# Altium PCB NC1-1B-PANEL.PcbDoc
Units mm, origin at the board's own origin, x right, y up, seen from the top; angles counter-clockwise.
Board outline 158 x 88 mm, 4 copper layers (Top Layer, Mid 1 (GND), Mid 2 (PWR), Bottom Layer), stack 1.586 mm thick; 10 components, 0 nets, 18 pads, 0 vias.
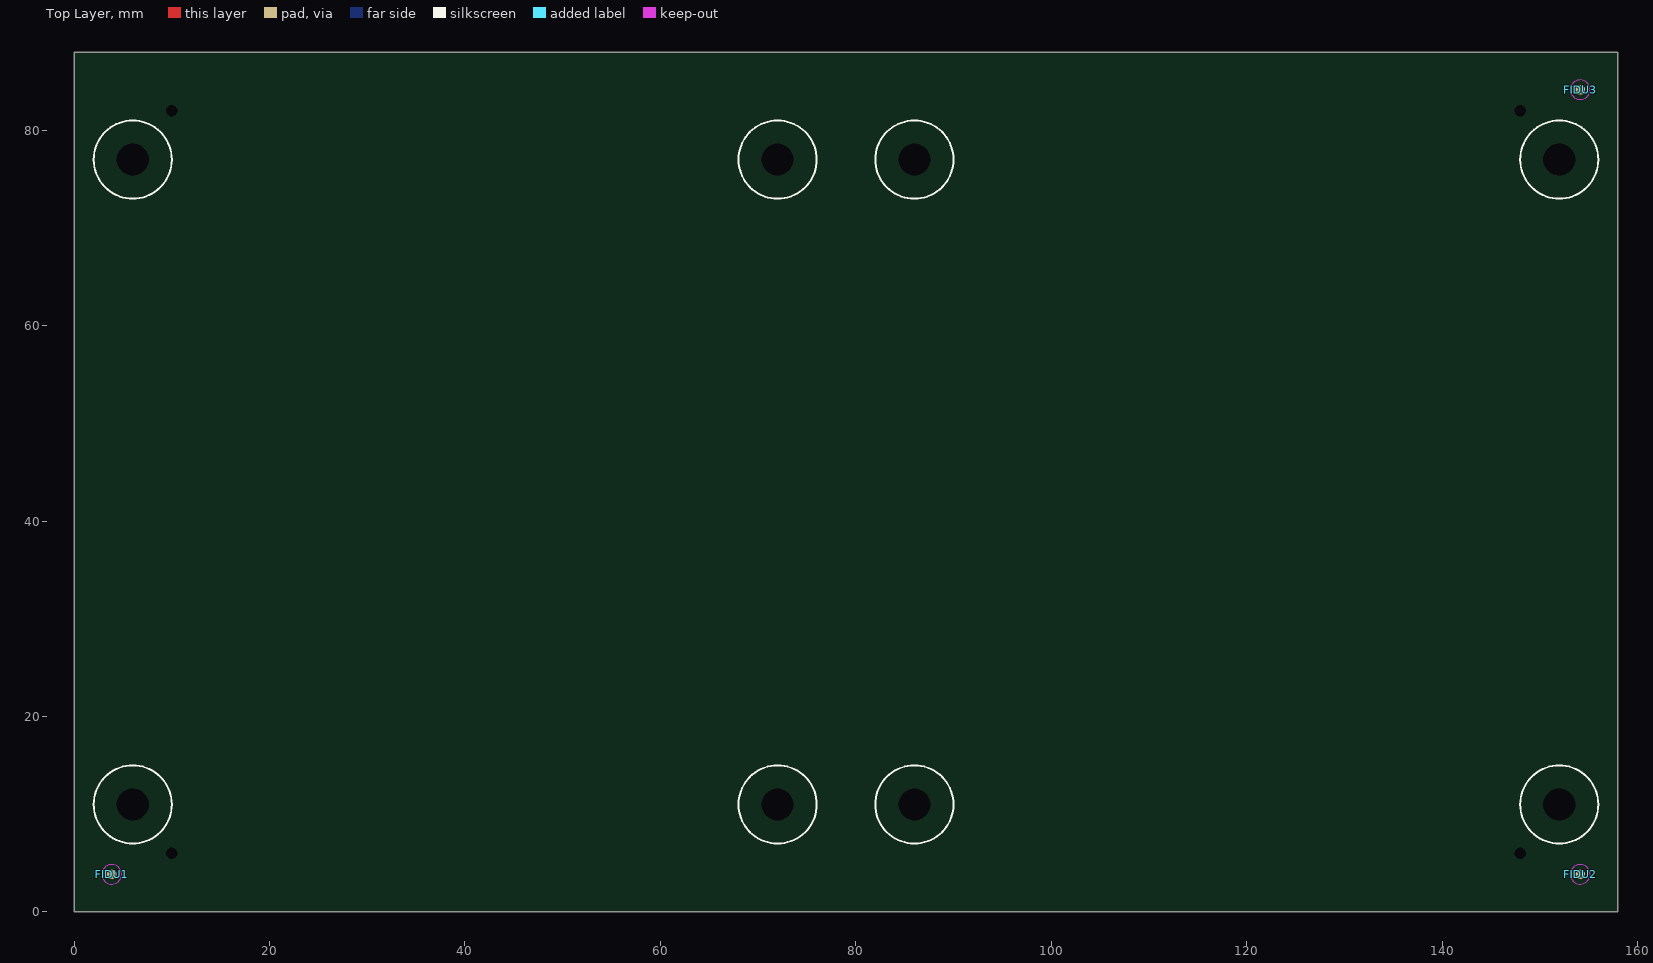
[diagram p0: Top Layer view]
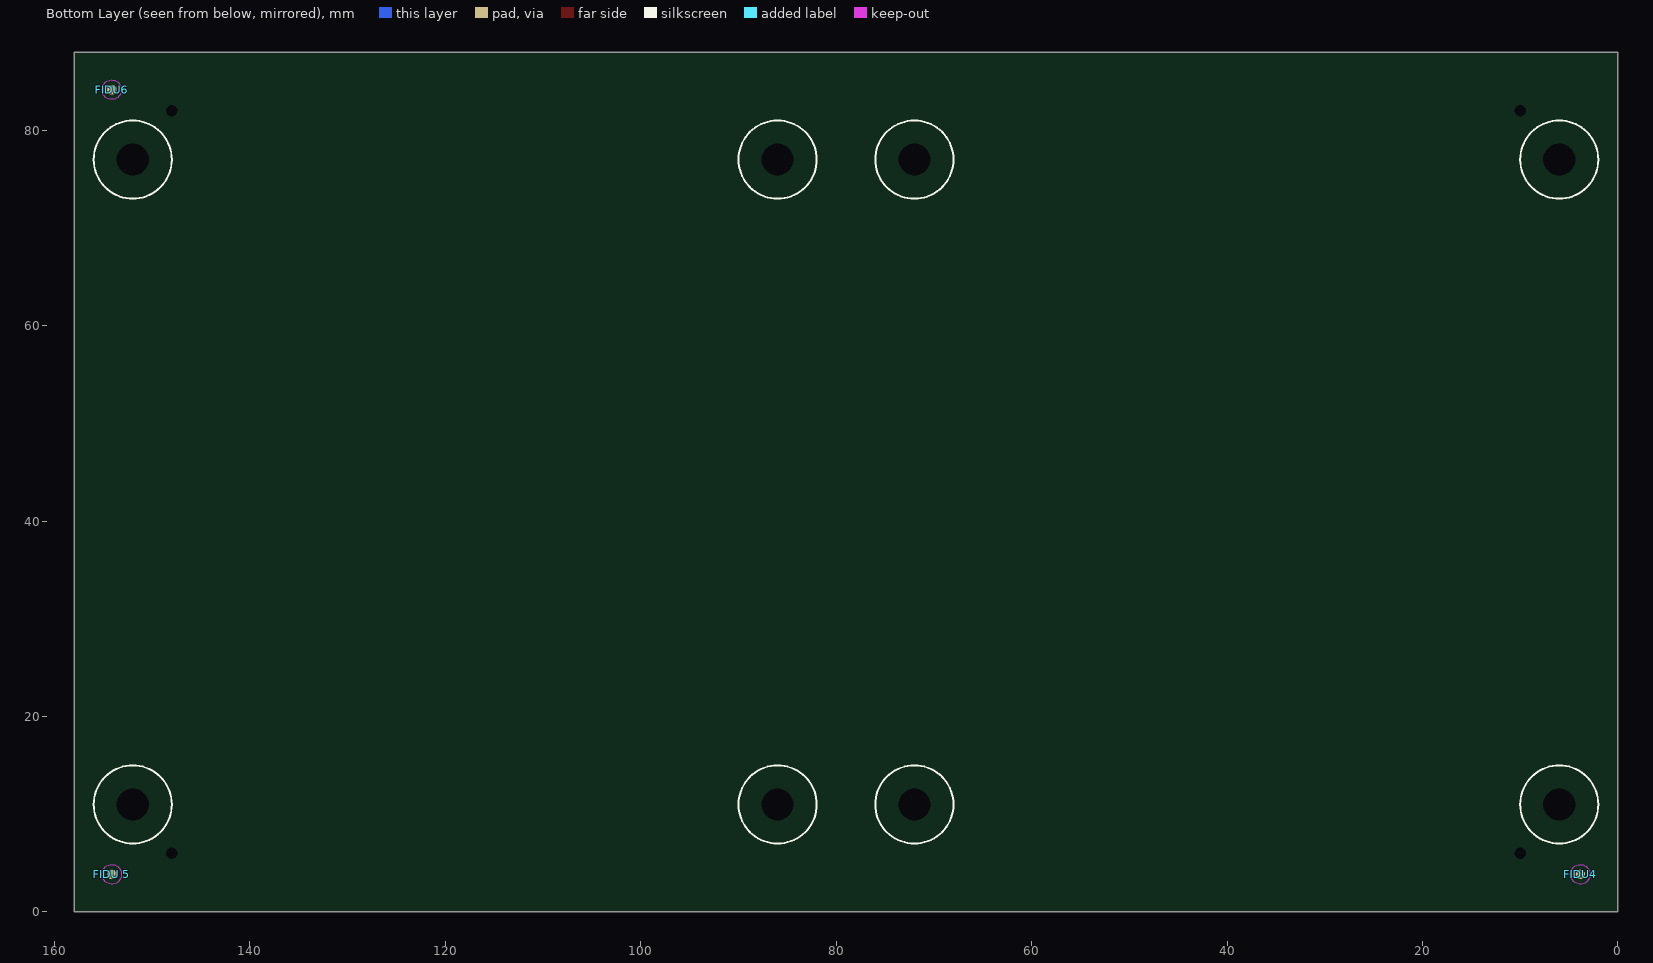
[diagram p1: Bottom Layer view, seen from below]

## Layer stack, top to bottom
Top Solder: solder mask 0.0102, Solder Resist, Dk 3.5
Top Layer: signal copper 0.035
Dielectric 2: prepreg 0.2104, PP-006, Dk 4.1
Mid 1 (GND): signal copper 0.0152
Dielectric 1: dielectric 1.065, FR-4, Dk 4.8
Mid 2 (PWR): signal copper 0.0152
Dielectric 3: prepreg 0.2104, PP-006, Dk 4.1
Bottom Layer: signal copper 0.035
Bottom Solder: solder mask 0.0102, Solder Resist, Dk 3.5

## Board outline
0,0 158,0 158,88 0,88

## Design rules (kind name [scope] priority, off if disabled: settings)
Clearance [All] p1: gap=0.254 ignorepadtopadclearanceinfootprint=FALSE except(0: Arc-Hole Track-Hole SMDPad-Hole THPad-Hole Via-Hole Fill-Hole Poly-Hole Region-Hole Text-Hole)
PolygonConnect [All] p1: connectstyle=Relief reliefconductorwidth=0.254 reliefentries=4 polygonreliefangle="90 Angle" airgapwidth=0.254
RoutingVias [All] p1: holewidth=0.711 width=1.27 viastyle="Through Hole" minholewidth=0.711 minwidth=1.27 maxholewidth=0.711 maxwidth=1.27
SolderMaskExpansion [All] p1: expansion=0.102 istentingtop=FALSE
Width [All] p1: maxlimit=0.254 minlimit=0.254 preferedwidth=0.254
30 further rules are at their usual default settings.

## Components (designator, comment, footprint, x,y, rotation, side; value= is the part's Value field where it differs from the comment)
FIDU1 "Comment" FIDU 3.85,3.85 r0 top
FIDU2 "Comment" FIDU 154.15,3.85 r0 top
FIDU3 "Comment" FIDU 154.15,84.15 r0 top
FIDU4 "Comment" FIDU 3.85,3.85 r180 bottom
FIDU6 "Comment" FIDU 154.15,84.15 r180 bottom
"FIDU 5" "Comment" FIDU 154.15,3.85 r180 bottom
? "Comment" JLC-TOOLING 10,82 r0 top
? "Comment" JLC-TOOLING 148,6 r0 top
? "Comment" JLC-TOOLING 148,82 r0 top
? "Comment" JLC-TOOLING 10,6 r0 top

## Footprints (in the part's own frame and the unit in brackets; to place one, negate y for a bottom-side part, rotate by r counter-clockwise, add the part's x,y. Pads: shape width x height; smd on the part's side, far side on the other; paste and mask are expansions set on the pad)
FIDU [mm]
  round 1 smd mask+0.5: 1(0,0)
  Top Layer keep-out circle w0.1: c0,0 r1
JLC-TOOLING [mm] "Tooling holes as specified by JLCPCB"
  round 0 hole 1.152 unplated paste-2539.97 mask+0.65: 0(0,0)

## Free pads (board coordinates)
  round 0 hole 3.3 unplated: M(6,11) M(6,77) M(72,11) M(72,77) M(86,11) M(86,77) M(152,11) M(152,77)

## Nets (pads, with @x,y where several pads share a name; then routed paths per layer and width w, separated by ;. In a path a pad name is that pad's centre, name@x,y a point inside that pad or via, vN(x,y) a via of type N, cw(c..) or ccw(c..) an arc to the next point about the centre after c; other vN are vias at no path point)
pads on no net: "FIDU 5.1" ?.0 FIDU1.1 FIDU2.1 FIDU3.1 FIDU4.1 FIDU6.1

## Silkscreen, mask and mechanical layers (free items; w line width, h text height)
Top Overlay:
  circle w0.2: c86,77 r4
  circle w0.2: c152,77 r4
  circle w0.2: c152,11 r4
  circle w0.2: c86,11 r4
  circle w0.2: c6,77 r4
  circle w0.2: c72,77 r4
  circle w0.2: c72,11 r4
  circle w0.2: c6,11 r4
Bottom Overlay:
  circle w0.2: c86,11 r4
  circle w0.2: c152,11 r4
  circle w0.2: c152,77 r4
  circle w0.2: c86,77 r4
  circle w0.2: c6,11 r4
  circle w0.2: c72,11 r4
  circle w0.2: c72,77 r4
  circle w0.2: c6,77 r4
Board:
  lines w0.1: 1.904,26.539 ccw(c1,26.111) 0,26.111 0,0 158,0 158,26.111 ccw(c157,26.111) 156.096,26.539 ; 1.904,61.461 cw(c1,61.889) 0,61.889 0,88 158,88 ; 9.383,15.648 ccw(c39,44) 10.648,14.383 ; 9.383,72.352 cw(c39,44) 10.648,73.617 ; 22.487,6.472 ccw(c39,44) 55.513,6.472 ; 22.487,81.528 cw(c39,44) 55.513,81.528 ; 67.352,14.383 ccw(c39,44) 68.617,15.648 ; 67.352,73.617 cw(c39,44) 68.617,72.352 ; 76.528,27.487 ccw(c39,44) 78.048,31.499 cw(c79,31.194) 79.952,31.499 ccw(c119,44) 81.472,27.487 ; 76.528,60.513 cw(c39,44) 78.048,56.501 ccw(c79,56.806) 79.952,56.501 cw(c119,44) 81.472,60.513 ; 89.383,15.648 ccw(c119,44) 90.648,14.383 ; 89.383,72.352 cw(c119,44) 90.648,73.617 ; 102.487,6.472 ccw(c119,44) 135.513,6.472 ; 102.487,81.528 cw(c119,44) 135.513,81.528 ; 147.352,14.383 ccw(c119,44) 148.617,15.648 ; 147.352,73.617 cw(c119,44) 148.617,72.352 ; 156.096,61.461 ccw(c157,61.889) 158,61.889 ; 158,61.889 158,88 ; 158,61.889 158,88

## Dimensions
158,0 to 158,88 on Dimensions
0,0 to 158,0 on Dimensions

## Panel: embedded boards
"NC1-1B-BASIS.PcbDoc" at 39,44, 1 rows x 2 columns, spacing 80 x 80, rotation 0